# EAGLE board inktime (EAGLE 9.7.0)
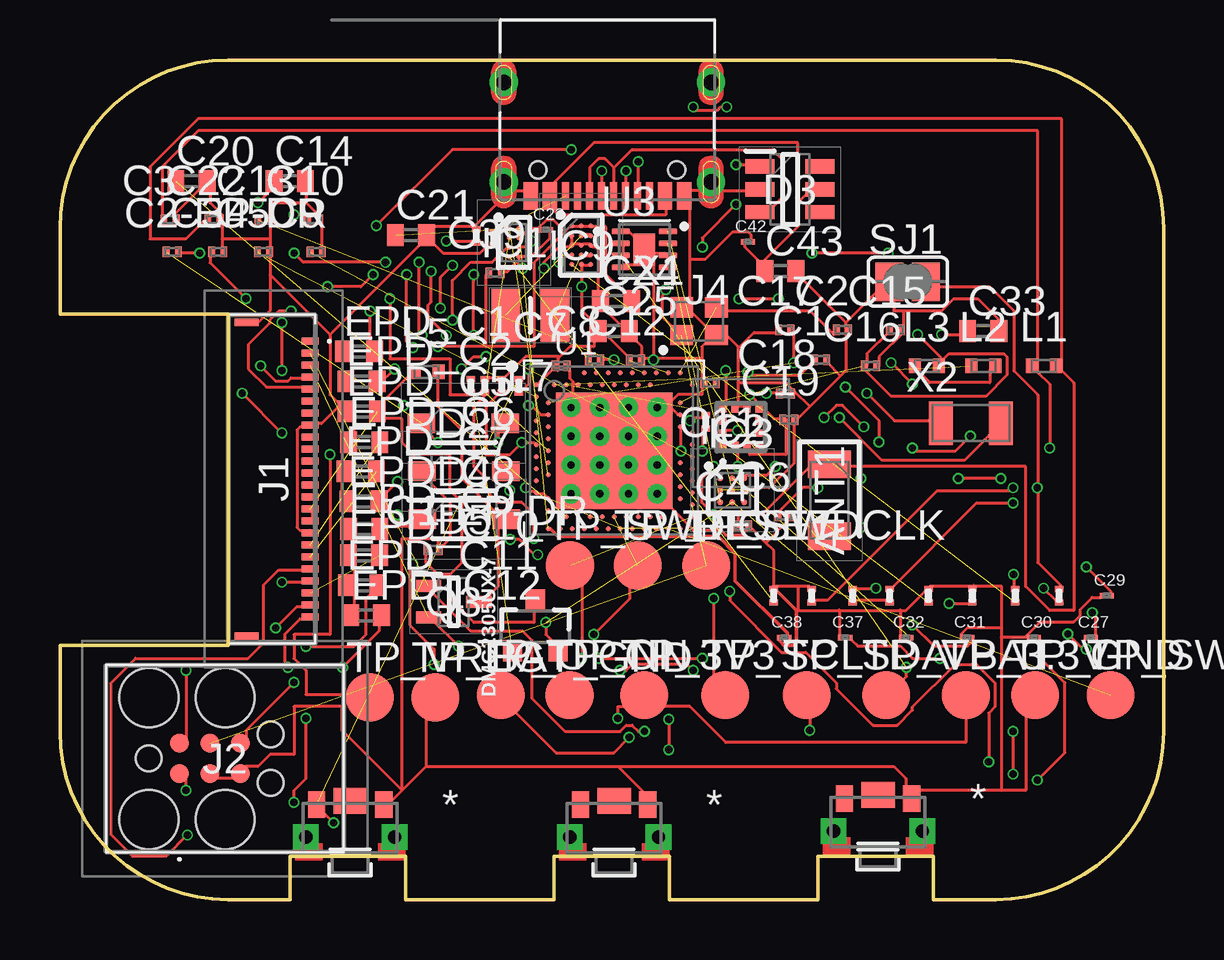
[diagram p0: board, top side]
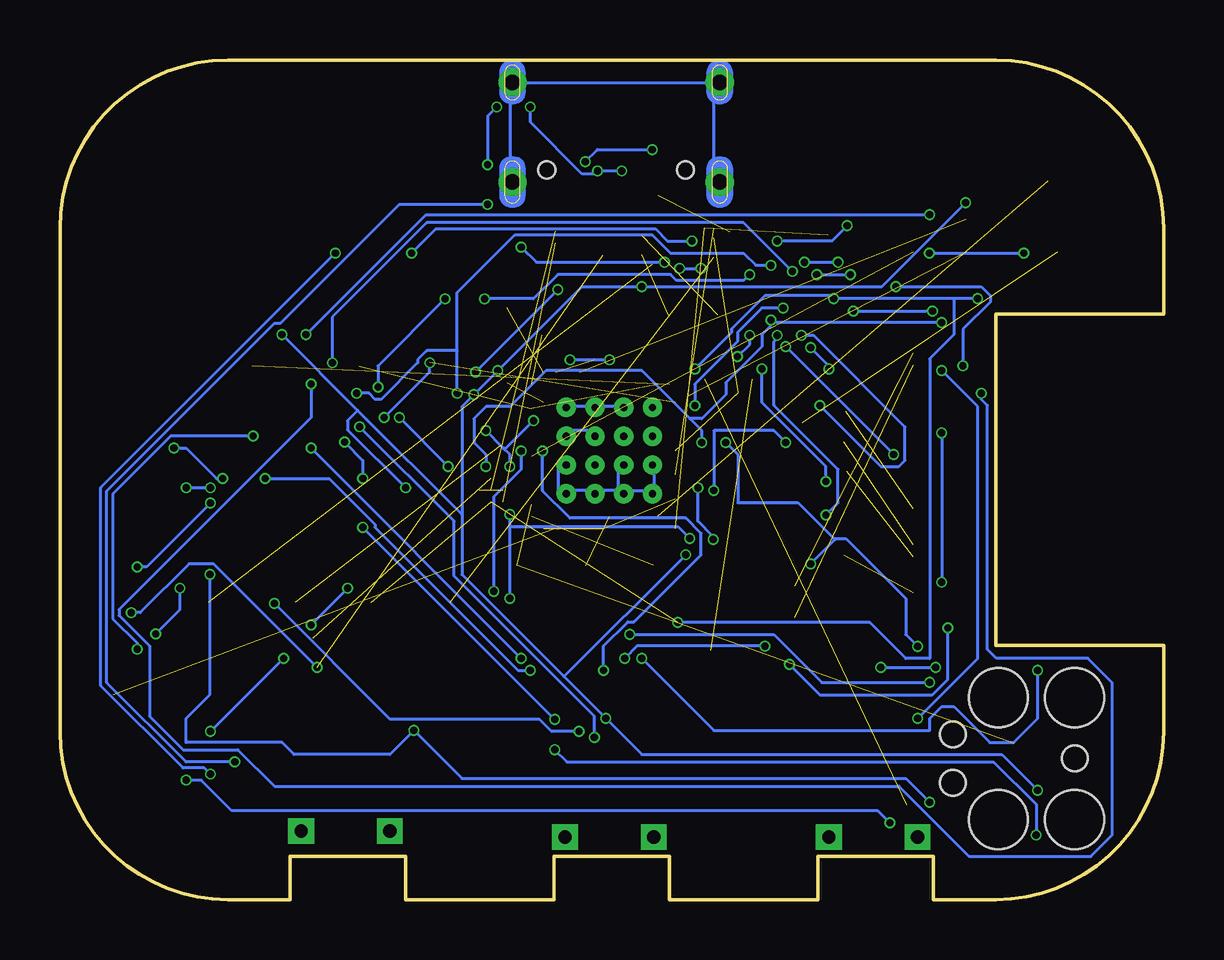
[diagram p1: board, bottom side, seen from below]

Size 46 x 35 mm. Coordinates in mm from the lower left corner, seen from the top.
Outline: 39,0 36.4,0 36.4,1.8 31.6,1.8 31.6,0 25.4,0 25.4,1.8 20.6,1.8 20.6,0 14.4,0 14.4,1.8 9.6,1.8 9.6,0 7,0 arc-90 0,7 0,10.6 7,10.6 7,24.4 0,24.4 0,28 arc-90 7,35 39,35 arc-90 46,28 46,7 arc-90 39,0
Copper layers (1*16): Top 0.035mm / dielectric 1.6mm / Bottom 0.035mm
Design rules "Fusion Electronics Design Rules *": minimum track width 5mil, minimum drill 0.3mm, track to track 5mil, track to pad 5mil, pad to pad 5mil, via to via 5mil, smd to smd 5mil, copper to edge 0.2mm, drill to drill 6mil, minimum pad ring 10mil, minimum via ring 3mil, stop-mask expansion 4mil, vias tented up to drill 0mil, thermal gap 10mil

## Footprints (pad centres in the part's own frame; a part is rotated, then mirrored left to right if it is on the bottom)
2450AT18B100E_ANTC3216X140N = smd 1.15 x 1.8: 1 -1.5,0; 2 1.5,0
NORDIC_NRF_3_RESC0201_L = smd 0.28 x 0.43: 1 -0.255,0; 2 0.255,0
ESP32_C6_LIBRARY_1_ESP32_WROVER_EAGLE-LTSPICE_C0402 = smd 0.7 x 0.9: 1 -0.65,0; 2 0.65,0
GRM011R60J152KE01L_2_CAPC0201X13N = smd 0.22 x 0.23: 1 -0.185,0; 2 0.185,0
ESP32_C6_LIBRARY_5_SOD3716X135N = smd 1.15 x 0.8: 1 -1.75,0; 2 1.75,0
ESP32_C6_LIBRARY_3_SOT95P280X145-6N = smd 1.2 x 0.6: 1 -1.25,0.95; 2 -1.25,0; 3 -1.25,-0.95; 4 1.25,-0.95; 5 1.25,0; 6 1.25,0.95
ESP32_C6_LIBRARY_4_ESP32_C6_LIBRARY_4_ESP32_C6_LIBRARY_4_ESP32_C6_LIBRARY_4_ESP32_WROVER_SPARKFUN-DISCRETESEMI_SOT23-3 = smd 0.8 x 0.9: 1 -0.95,-1; 2 0.95,-1; 3 0,1.1
BQ25180YBGR_BGA8C40P2X4_100X155X50 = smd 0.2 x 0.2: A1 -0.2,0.6; A2 0.2,0.6; B1 -0.2,0.2; B2 0.2,0.2; C1 -0.2,-0.2; C2 0.2,-0.2; D1 -0.2,-0.6; D2 0.2,-0.6
DRV2605YZFR_BGA9C50P3X3_144X144X62 = smd 0.25 x 0.25: A1 -0.5,0.5; A2 0,0.5; A3 0.5,0.5; B1 -0.5,0; B2 0,0; B3 0.5,0; C1 -0.5,-0.5; C2 0,-0.5; C3 0.5,-0.5
BMA423_BMA423 = smd 0.3 x 0.35: 1 -0.75,-0.775; 2 -0.25,-0.775; 3 0.25,-0.775; 4 0.75,-0.775; 7 0.75,0.775; 8 0.25,0.775; 9 -0.25,0.775; 10 -0.75,0.775 | smd 0.35 x 0.3: 5 0.775,-0.25; 6 0.775,0.25; 11 -0.775,0.25; 12 -0.775,-0.25
RT6160AWSC_BGA15C40P3X5_140X230X60 = smd 0.216 x 0.216: A1 -0.4,0.8; A2 0,0.8; A3 0.4,0.8; B1 -0.4,0.4; B2 0,0.4; B3 0.4,0.4; C1 -0.4,0; C2 0,0; C3 0.4,0; D1 -0.4,-0.4; D2 0,-0.4; D3 0.4,-0.4; E1 -0.4,-0.8; E2 0,-0.8; E3 0.4,-0.8
503480-2400_5034802400 = smd 0.3 x 0.7: 1 -5.75,1.525; 2 -5.25,1.525; 3 -4.75,1.525; 4 -4.25,1.525; 5 -3.75,1.525; 6 -3.25,1.525; 7 -2.75,1.525; 8 -2.25,1.525; 9 -1.75,1.525; 10 -1.25,1.525; 11 -0.75,1.525; 12 -0.25,1.525; 13 0.25,1.525; 14 0.75,1.525; 15 1.25,1.525; 16 1.75,1.525; 17 2.25,1.525; 18 2.75,1.525; 19 3.25,1.525; 20 3.75,1.525; 21 4.25,1.525; 22 4.75,1.525; 23 5.25,1.525; 24 5.75,1.525 | smd 0.3 x 1: MP1 -6.54,-1.125; MP2 6.54,-1.125
TC2030-IDC_TC2030IDC = smd 0.783 x 0.783: 1 -0.953,-0.635; 2 -0.953,0.635; 3 0.317,-0.635; 4 0.317,0.635; 5 1.588,-0.635; 6 1.588,0.635 | hole 2.451: -2.223,-2.54; -2.223,2.54; 0.952,-2.54; 0.952,2.54 | hole 1.067: -2.223,0; 2.857,-1.016; 2.857,1.016
KH-TYPE-C-16P_KINGHELM_KH-TYPE-C-16P = smd 0.6 x 1.15: A1_B12 -3.2,4.725; A4_B9 -2.4,4.725; A9_B4 2.4,4.725; A12_B1 3.2,4.725 | smd 0.3 x 1.15: A5 -1.25,4.725; A6 -0.25,4.725; A7 0.25,4.725; A8 1.25,4.725; B5 1.75,4.725; B6 0.75,4.725; B7 -0.75,4.725; B8 -1.75,4.725 | drill 0.65 pad 1.05: SH1 -4.32,0; SH2 4.32,0; SH3 -4.32,4.15; SH4 4.32,4.15 | hole 0.7: -2.89,3.65; 2.89,3.65
NORDIC_NRF_2_RESC0402_L = smd 0.5 x 0.6: 1 -0.5,0; 2 0.5,0
MLP2016SR47MT0S1_INDC2016X100N = smd 1.2 x 2.2: 1 -1.028,0; 2 1.028,0
ESP32_C6_LIBRARY_6_SOT65P210X110-3N = smd 1.05 x 0.5: 1 -1.05,0.65; 2 -1.05,-0.65; 3 1.05,0
ERA-1AEB3401C_0201 = smd 0.35 x 0.25: 1 0,0.275; 2 0,-0.275
CPF0201D7K68C1_0201 = smd 0.35 x 0.25: 1 0,0.275; 2 0,-0.275
ESP32_C6_LIBRARY_7_JUMPER_SJ = smd 1.168 x 1.6: 1 -0.762,0; 2 0.762,0
2025-10-22_07-23-44_LIBRARY_SW_EVP-AKE31A_PAN = smd 0.711 x 1.092: 1 -1.4,-0.972; 2 1.4,-0.972 | drill 0.559 pad 0.914 square: 3 -1.848,0.381; 4 1.848,0.381 | smd 1.397 x 1.092: 5 0,-1.124
HECTOR_WATCH_1_TP20R = smd 2 x 2: TP 0,0
NORDIC_NRF_4_AQFN50P700X700X85_HS-74N = smd 4.85 x 4.85: P$74 0,0 | drill 0.3 pad 0.6: P$75 -1.8,1.8; P$76 -0.6,1.8; P$77 0.6,1.8; P$78 1.8,1.8; P$79 -1.8,0.6; P$80 -0.6,0.6; P$81 0.6,0.6; P$82 1.8,0.6; P$83 -1.8,-0.6; P$84 -0.6,-0.6; P$85 0.6,-0.6; P$86 1.8,-0.6; P$87 -1.8,-1.8; P$88 -0.6,-1.8; P$89 0.6,-1.8; P$90 1.8,-1.8 | smd 0.2 x 0.2: P$A8 -1.25,3.25; P$A10 -0.75,3.25; P$A12 -0.25,3.25; P$A14 0.25,3.25; P$A16 0.75,3.25; P$A18 1.25,3.25; P$A20 1.75,3.25; P$A22 2.25,3.25; P$A23 2.75,3.25; P$AA24 3.25,-2.25; P$AB2 -2.75,-2.5; P$AC5 -2,-2.75; P$AC9 -1,-2.75; P$AC11 -0.5,-2.75; P$AC13 0,-2.75; P$AC15 0.5,-2.75; P$AC17 1,-2.75; P$AC19 1.5,-2.75; P$AC21 2,-2.75; P$AC24 3.25,-2.75; P$AD2 -2.75,-3.25; P$AD4 -2.25,-3.25; P$AD6 -1.75,-3.25; P$AD8 -1.25,-3.25; P$AD10 -0.75,-3.25; P$AD12 -0.25,-3.25; P$AD14 0.25,-3.25; P$AD16 0.75,-3.25; P$AD18 1.25,-3.25; P$AD20 1.75,-3.25; P$AD22 2.25,-3.25; P$AD23 2.75,-3.25; P$B1 -3.25,2.75; P$B3 -2.5,2.75; P$B5 -2,2.75; P$B7 -1.5,2.75; P$B9 -1,2.75; P$B11 -0.5,2.75; P$B13 0,2.75; P$B15 0.5,2.75; P$B17 1,2.75; P$B19 1.5,2.75; P$B24 3.25,2.75; P$C1 -3.25,2.25; P$D2 -2.75,2; P$D23 2.75,2; P$E24 3.25,1.75; P$F2 -2.75,1.5; P$F23 2.75,1.5; P$G1 -3.25,1.25; P$H2 -2.75,1; P$H23 2.75,1; P$J1 -3.25,0.75; P$J24 3.25,0.75; P$K2 -2.75,0.5; P$L1 -3.25,0.25; P$L24 3.25,0.25; P$M2 -2.75,0; P$N1 -3.25,-0.25; P$N24 3.25,-0.25; P$P2 -2.75,-0.5; P$P23 2.75,-0.5; P$R1 -3.25,-0.75; P$R24 3.25,-0.75; P$T2 -2.75,-1; P$T23 2.75,-1; P$U1 -3.25,-1.25; P$U24 3.25,-1.25; P$V23 2.75,-1.5; P$W1 -3.25,-1.75; P$W24 3.25,-1.75; P$Y2 -2.75,-2; P$Y23 2.75,-2
ESP32_C6_LIBRARY_SON50P200X200X80-9N = smd 0.76 x 0.27: 1 -0.985,0.75; 2 -0.985,0.25; 3 -0.985,-0.25; 4 -0.985,-0.75; 5 0.985,-0.75; 6 0.985,-0.25; 7 0.985,0.25; 8 0.985,0.75 | smd 0.9 x 1.3: 9 0,0
NORDIC_NRF_BT-XTAL_2016_N = smd 0.95 x 0.85: 1 -0.725,-0.575; 2 0.725,-0.575; 3 0.725,0.575; 4 -0.725,0.575
NORDIC_NRF_1_XTAL_3215_N = smd 1 x 1.8: 1 -1.25,0; 2 1.25,0

## Placement (x,y rotation side)
ANT1  2450AT18B100E  [2450AT18B100E_ANTC3216X140N]  32.07,16.65 270 top
C1  12pF  [NORDIC_NRF_3_RESC0201_L]  31.7,22.5 0 top
C1-EP-DR  10uF  [NORDIC_NRF_3_RESC0201_L]  15.56,14.59 0 top
C2  12pF  [NORDIC_NRF_3_RESC0201_L]  32.62,23.75 0 top
C2-EP-DR  4.7uF/25V  [NORDIC_NRF_3_RESC0201_L]  4.68,27 0 top
C3  1pF  [NORDIC_NRF_3_RESC0201_L]  4.59,28.35 0 top
C4  1pF  [NORDIC_NRF_3_RESC0201_L]  28.45,15.6 0 top
C5  100nF  [NORDIC_NRF_3_RESC0201_L]  8.48,27 0 top
C6  4.7µF  [NORDIC_NRF_3_RESC0201_L]  30.18,16 0 top
C7  100nF  [NORDIC_NRF_3_RESC0201_L]  20.88,22.25 0 top
C8  100nF  [NORDIC_NRF_3_RESC0201_L]  22.28,22.5 0 top
C9  820pF  [NORDIC_NRF_3_RESC0201_L]  10.68,27 0 top
C10  N.C.  [NORDIC_NRF_3_RESC0201_L]  10.58,28.35 0 top
C11  100pF  [NORDIC_NRF_3_RESC0201_L]  27.1,21.54 180 top
C12  100nF  [NORDIC_NRF_3_RESC0201_L]  23.98,22.5 0 top
C13  N.C.  [NORDIC_NRF_3_RESC0201_L]  8.5,28.35 0 top
C14  4.7µF  [ESP32_C6_LIBRARY_1_ESP32_WROVER_EAGLE-LTSPICE_C0402]  9.58,29.95 0 top
C15  1.0µF  [NORDIC_NRF_3_RESC0201_L]  34.83,23.75 0 top
C16  47nF  [NORDIC_NRF_3_RESC0201_L]  33.79,22.25 0 top
C17  12pF  [NORDIC_NRF_3_RESC0201_L]  30.21,23.75 0 top
C18  12pF  [NORDIC_NRF_3_RESC0201_L]  30.24,21.1 0 top
C19  100nF  [NORDIC_NRF_3_RESC0201_L]  30.38,20 0 top
C20  4.7µF  [ESP32_C6_LIBRARY_1_ESP32_WROVER_EAGLE-LTSPICE_C0402]  5.48,29.95 0 top
C21  4.7µF  [ESP32_C6_LIBRARY_1_ESP32_WROVER_EAGLE-LTSPICE_C0402]  14.63,27.7 0 top
C22  N.C.  [NORDIC_NRF_3_RESC0201_L]  6.42,28.35 0 top
C23  0.1uF  [GRM011R60J152KE01L_2_CAPC0201X13N]  20.26,27.92 0 top
C24  10uF  [ESP32_C6_LIBRARY_1_ESP32_WROVER_EAGLE-LTSPICE_C0402]  23.18,24.95 0 top
C25  22uF  [ESP32_C6_LIBRARY_1_ESP32_WROVER_EAGLE-LTSPICE_C0402]  23.08,23.7 0 top
C27  0.1uF  [GRM011R60J152KE01L_2_CAPC0201X13N]  42.97,10.92 0 top
C29  1uF  [GRM011R60J152KE01L_2_CAPC0201X13N]  43.64,12.67 0 top
C30  1uF  [GRM011R60J152KE01L_2_CAPC0201X13N]  40.6,10.92 0 top
C31  1uF  [GRM011R60J152KE01L_2_CAPC0201X13N]  37.81,10.92 0 top
C32  1uF  [GRM011R60J152KE01L_2_CAPC0201X13N]  35.27,10.92 0 top
C33  22uF  [ESP32_C6_LIBRARY_1_ESP32_WROVER_EAGLE-LTSPICE_C0402]  38.48,23.7 0 top
C34  0.1uF  [NORDIC_NRF_3_RESC0201_L]  6.58,27 0 top
C37  1uF  [GRM011R60J152KE01L_2_CAPC0201X13N]  32.73,10.92 0 top
C38  1uF  [GRM011R60J152KE01L_2_CAPC0201X13N]  30.19,10.92 0 top
C39  10uF  [NORDIC_NRF_3_RESC0201_L]  18.14,26.12 0 top
C42  0.1uF  [GRM011R60J152KE01L_2_CAPC0201X13N]  28.68,27.42 0 top
C43  4.7uF  [ESP32_C6_LIBRARY_1_ESP32_WROVER_EAGLE-LTSPICE_C0402]  30.03,26.2 0 top
D2  ESP32_C6_LIBRARY_5_MBR0530  [ESP32_C6_LIBRARY_5_SOD3716X135N]  16.82,19.86 0 top
D3  USBLC6-2SC6Y  [ESP32_C6_LIBRARY_3_SOT95P280X145-6N]  30.43,29.61 0 top
D4  ESP32_C6_LIBRARY_5_MBR0530  [ESP32_C6_LIBRARY_5_SOD3716X135N]  16.84,17.86 0 top
D5  ESP32_C6_LIBRARY_5_MBR0530  [ESP32_C6_LIBRARY_5_SOD3716X135N]  16.86,15.86 0 top
DMG2305UX-7  20V/4.2A/52mΩ/1.4W  [ESP32_C6_LIBRARY_4_ESP32_C6_LIBRARY_4_ESP32_C6_LIBRARY_4_ESP32_C6_LIBRARY_4_ESP32_WROVER_SPARKFUN-DISCRETESEMI_SOT23-3]  19.81,11.38 0 top
EPD_C1  1uF/50V  [ESP32_C6_LIBRARY_1_ESP32_WROVER_EAGLE-LTSPICE_C0402]  12.46,22.85 0 top
EPD_C2  1uF/50V  [ESP32_C6_LIBRARY_1_ESP32_WROVER_EAGLE-LTSPICE_C0402]  12.57,21.6 0 top
EPD_C5  0.1uF/50V  [ESP32_C6_LIBRARY_1_ESP32_WROVER_EAGLE-LTSPICE_C0402]  12.58,20.35 0 top
EPD_C6  1uF/50V  [ESP32_C6_LIBRARY_1_ESP32_WROVER_EAGLE-LTSPICE_C0402]  12.68,19.07 0 top
EPD_C7  1uF/50V  [ESP32_C6_LIBRARY_1_ESP32_WROVER_EAGLE-LTSPICE_C0402]  12.54,17.85 0 top
EPD_C8  1uF/50V  [ESP32_C6_LIBRARY_1_ESP32_WROVER_EAGLE-LTSPICE_C0402]  12.65,16.6 0 top
EPD_C9  1uF/50V  [ESP32_C6_LIBRARY_1_ESP32_WROVER_EAGLE-LTSPICE_C0402]  12.68,15.45 0 top
EPD_C10  1uF/50V  [ESP32_C6_LIBRARY_1_ESP32_WROVER_EAGLE-LTSPICE_C0402]  12.67,14.35 0 top
EPD_C11  1uF/50V  [ESP32_C6_LIBRARY_1_ESP32_WROVER_EAGLE-LTSPICE_C0402]  12.6,13.1 0 top
EPD_C12  1uF/50V  [ESP32_C6_LIBRARY_1_ESP32_WROVER_EAGLE-LTSPICE_C0402]  12.76,11.85 0 top
IC1  BQ25180YBGR  [BQ25180YBGR_BGA8C40P2X4_100X155X50]  18.93,27.39 0 top
IC2  DRV2605YZFR  [DRV2605YZFR_BGA9C50P3X3_144X144X62]  28.03,17.07 0 top
IC3  BMA421  [BMA423_BMA423]  28.38,19.7 0 top
IC9  RT6160AWSC  [RT6160AWSC_BGA15C40P3X5_140X230X60]  21.73,27.28 0 top
J1  503480-2400  [503480-2400_5034802400]  8.9,17.53 270 top
J2  TC2030-IDC  [TC2030-IDC_TC2030IDC]  5.93,5.88 0 top
J4  KH-TYPE-C-16P  [KH-TYPE-C-16P_KINGHELM_KH-TYPE-C-16P]  22.82,34.07 180 top
L1  3.9nH  [NORDIC_NRF_2_RESC0402_L]  41.01,22.25 0 top
L2  10µH  [NORDIC_NRF_2_RESC0402_L]  38.48,22.25 0 top
L3  15nH  [NORDIC_NRF_2_RESC0402_L]  36.13,22.25 0 top
L5  68uH  [NORDIC_NRF_2_RESC0402_L]  15.28,22 0 top
L7  FTC252012SR47MBCA  [MLP2016SR47MT0S1_INDC2016X100N]  19.61,24.36 0 top
Q3  SI1308EDL-T1-GE3  [ESP32_C6_LIBRARY_6_SOT65P210X110-3N]  16.41,12.42 0 top
R1_EP_DR  0.47  [ERA-1AEB3401C_0201]  41.65,12.67 0 top
R1_USB  5K1  [CPF0201D7K68C1_0201]  17.36,27.67 0 top
R2  0  [CPF0201D7K68C1_0201]  39.82,12.67 0 top
R2_EP_DR  10K  [ERA-1AEB3401C_0201]  38.03,12.67 0 top
R2_USB  5K1  [ERA-1AEB3401C_0201]  18.08,27.56 0 top
R3  0  [ERA-1AEB3401C_0201]  36.2,12.67 0 top
R4  0  [CPF0201D7K68C1_0201]  26.91,19.92 0 top
R5  10k  [CPF0201D7K68C1_0201]  19.12,21.42 0 top
R7  10k  [CPF0201D7K68C1_0201]  34.58,12.67 0 top
R8  10k  [CPF0201D7K68C1_0201]  33.04,12.67 0 top
R9  10K  [ERA-1AEB3401C_0201]  29.75,12.67 0 top
R17  3K3  [CPF0201D7K68C1_0201]  17.71,21.42 0 top
R18  3K3  [CPF0201D7K68C1_0201]  18.42,21.42 0 top
R_PWR_EPD  10K  [CPF0201D7K68C1_0201]  17.13,21.42 0 top
R_TYPE_SEL  2.2  [ERA-1AEB3401C_0201]  31.34,12.67 0 top
SJ1  [ESP32_C6_LIBRARY_7_JUMPER_SJ]  35.34,25.76 0 top
SW_DN  2025-10-22_07-23-44_LIBRARY_EVP-AKE31ASW_EVP-AKE31A_PAN  [2025-10-22_07-23-44_LIBRARY_SW_EVP-AKE31A_PAN]  34.1,3.24 180 top
SW_ENT  2025-10-22_07-23-44_LIBRARY_EVP-AKE31ASW_EVP-AKE31A_PAN  [2025-10-22_07-23-44_LIBRARY_SW_EVP-AKE31A_PAN]  23.1,2.99 180 top
SW_UP  2025-10-22_07-23-44_LIBRARY_EVP-AKE31ASW_EVP-AKE31A_PAN  [2025-10-22_07-23-44_LIBRARY_SW_EVP-AKE31A_PAN]  12.1,2.99 180 top
TP_3.3V  HECTOR_WATCH_1_TPTP20R  [HECTOR_WATCH_1_TP20R]  37.76,8.53 0 top
TP_3V3  HECTOR_WATCH_1_TPTP20R  [HECTOR_WATCH_1_TP20R]  24.36,8.53 0 top
TP_BAT_GND  HECTOR_WATCH_1_TPTP20R  [HECTOR_WATCH_1_TP20R]  15.64,8.43 0 top
TP_GND  HECTOR_WATCH_1_TPTP20R  [HECTOR_WATCH_1_TP20R]  40.65,8.53 0 top
TP_ON  HECTOR_WATCH_1_TPTP20R  [HECTOR_WATCH_1_TP20R]  21.24,8.53 0 top
TP_OP  HECTOR_WATCH_1_TPTP20R  [HECTOR_WATCH_1_TP20R]  18.37,8.53 0 top
TP_RESET  HECTOR_WATCH_1_TPTP20R  [HECTOR_WATCH_1_TP20R]  24.08,13.93 0 top
TP_SCL  HECTOR_WATCH_1_TPTP20R  [HECTOR_WATCH_1_TP20R]  27.73,8.53 0 top
TP_SDA  HECTOR_WATCH_1_TPTP20R  [HECTOR_WATCH_1_TP20R]  31.12,8.53 0 top
TP_SWDCLK  HECTOR_WATCH_1_TPTP20R  [HECTOR_WATCH_1_TP20R]  26.94,13.93 0 top
TP_SWDIO  HECTOR_WATCH_1_TPTP20R  [HECTOR_WATCH_1_TP20R]  21.26,13.93 0 top
TP_SWO  HECTOR_WATCH_1_TPTP20R  [HECTOR_WATCH_1_TP20R]  43.79,8.53 0 top
TP_VBAT  HECTOR_WATCH_1_TPTP20R  [HECTOR_WATCH_1_TP20R]  34.43,8.53 0 top
TP_VREG  HECTOR_WATCH_1_TPTP20R  [HECTOR_WATCH_1_TP20R]  12.92,8.43 0 top
U1  NRF52840_QF  [NORDIC_NRF_4_AQFN50P700X700X85_HS-74N]  23.1,18.72 0 top
U3  MAX17048G+T10  [ESP32_C6_LIBRARY_SON50P200X200X80-9N]  24.36,27.11 0 top
X1  32MHz  [NORDIC_NRF_BT-XTAL_2016_N]  26.64,24.11 0 top
X2  32.768kHz  [NORDIC_NRF_1_XTAL_3215_N]  37.97,19.86 0 top

## Library data of the parts
ANT1 = InkTime_v5 (1); ARROW_PART_NUMBER: 2450AT18B100E; ARROW_PRICE-STOCK: https://www.arrow.com/en/products/2450at18b100e/johanson-dielectrics?utm_currency=USD&region=nac; DESCRIPTION: Antennas 2.45GHz ANTENNA; HEIGHT: 1.4mm; MANUFACTURER_NAME: JOHANSON TECHNOLOGY; MANUFACTURER_PART_NUMBER: 2450AT18B100E; MOUSER_PART_NUMBER: 609-2450AT18B100E; MOUSER_PRICE-STOCK: https://www.mouser.co.uk/ProductDetail/Johanson-Technology/2450AT18B100E?qs=yCnrNFeXz%252Bh5MFsFIXGZGA%3D%3D
C1 C1-EP-DR C2 C2-EP-DR C3-C13 C15-C19 C22 C34 C39 L1-L3 L5 R1_EP_DR R1_USB R2 R2_EP_DR R2_USB R3-R5 R7-R9 R17 R18 R_PWR_EPD R_TYPE_SEL SJ1 TP_3.3V TP_3V3 TP_BAT_GND TP_GND TP_ON TP_OP TP_RESET TP_SCL TP_SDA TP_SWDCLK TP_SWDIO TP_SWO TP_VBAT TP_VREG U1 X1 X2 = InkTime_v5 (1)
C14 C20 C21 C24 C25 C33 C43 EPD_C1 EPD_C2 EPD_C5-EPD_C12 = InkTime_v5 (1); SPICEMODEL: NONE; SPICEPREFIX: C
C23 C27 C29-C32 C37 C38 C42 = InkTime_v5 (1); AVAILABILITY: In Stock; CHECK_PRICES: https://www.snapeda.com/parts/GRM011R60J152KE01L/Murata/view-part/?ref=eda; DESCRIPTION: SMD Capacitor X5R(EIA) with Capacitance: 1500pF Tol. 10%. Rated Voltage: 6.3Vdc; MF: Murata; MP: GRM011R60J152KE01L; PACKAGE: 0201 Murata; PRICE: None; SNAPEDA_LINK: https://www.snapeda.com/parts/GRM011R60J152KE01L/Murata/view-part/?ref=snap
D2 D4 D5 = InkTime_v5 (1); AVAILABILITY: In Stock; CHECK_PRICES: https://www.snapeda.com/parts/MBR0530/Onsemi/view-part/?ref=eda; DESCRIPTION: Diode Schottky 30 V 500mA Surface Mount SOD-123; MF: ON Semiconductor; MP: MBR0530; PACKAGE: SOD-123-2 ON Semiconductor; PRICE: None; PURCHASE-URL: https://www.snapeda.com/api/url_track_click_mouser/?unipart_id=179458&manufacturer=ON Semiconductor&part_name=MBR0530&search_term=None; SNAPEDA_LINK: https://www.snapeda.com/parts/MBR0530/Onsemi/view-part/?ref=snap
D3 = InkTime_v5 (1); AVAILABILITY: In Stock; CHECK_PRICES: https://www.snapeda.com/parts/USBLC6-2SC6Y/STMicroelectronics/view-part/?ref=eda; DESCRIPTION: 17V Clamp 5A (8/20µs) Ipp Tvs Diode Surface Mount SOT-23-6; MF: STMicroelectronics; MP: USBLC6-2SC6Y; PACKAGE: SOT-23-6 STMicroelectronics; PRICE: None; SNAPEDA_LINK: https://www.snapeda.com/parts/USBLC6-2SC6Y/STMicroelectronics/view-part/?ref=snap
DMG2305UX-7 = InkTime_v5 (1); PROD_ID: TRAN-14388
IC1 = InkTime_v5 (1); ARROW_PART_NUMBER: BQ25180YBGR; ARROW_PRICE-STOCK: https://www.arrow.com/en/products/bq25180ybgr/texas-instruments?utm_currency=USD&region=nac; DESCRIPTION: Charger IC Lithium Ion/Polymer, Lithium Iron Phosphate 8-DSBGA (1.6x1.1); HEIGHT: 0.5mm; MANUFACTURER_NAME: Texas Instruments; MANUFACTURER_PART_NUMBER: BQ25180YBGR; MOUSER_PART_NUMBER: 595-BQ25180YBGR; MOUSER_PRICE-STOCK: https://www.mouser.co.uk/ProductDetail/Texas-Instruments/BQ25180YBGR?qs=doiCPypUmgEWjAK%252BJAX6Tw%3D%3D
IC2 = InkTime_v5 (1); ARROW_PART_NUMBER: DRV2605YZFR; ARROW_PRICE-STOCK: https://www.arrow.com/en/products/drv2605yzfr/texas-instruments?region=nac; DESCRIPTION: Haptic Driver for ERM/LRA with Built-In Library and Smart Loop Architecture; HEIGHT: 0.625mm; MANUFACTURER_NAME: Texas Instruments; MANUFACTURER_PART_NUMBER: DRV2605YZFR
IC3 = InkTime_v5 (1); ARROW_PART_NUMBER: BMA423; ARROW_PRICE-STOCK: https://www.arrow.com/en/products/bma423/bosch; DESCRIPTION: Accelerometers Triaxial low-g 12bit Acceleration Sensor; HEIGHT: 1mm; MANUFACTURER_NAME: BOSCH; MANUFACTURER_PART_NUMBER: BMA423; MOUSER_PART_NUMBER: 262-BMA423; MOUSER_PRICE-STOCK: https://www.mouser.co.uk/ProductDetail/Bosch-Sensortec/BMA423?qs=HXFqYaX1Q2xC%252BSgeGoX3mg%3D%3D
IC9 = InkTime_v5 (1); DESCRIPTION: Buck-Boost Regulator Positive Output Step-Up/Step-Down I2C DC-DC Controller IC 15-WL-CSP (BSC) (1.4x2.3); HEIGHT: 0.6mm; MANUFACTURER_NAME: RICHTEK; MANUFACTURER_PART_NUMBER: RT6160AWSC; MOUSER_PART_NUMBER: 835-RT6160AWSC; MOUSER_PRICE-STOCK: https://www.mouser.co.uk/ProductDetail/Richtek/RT6160AWSC?qs=amGC7iS6iy%2FLd9PSoixZXQ%3D%3D
J1 = InkTime_v5 (1); DESCRIPTION: FFC & FPC Connectors 0.5mm FPC RA SMT Dual Contact 24Ckt; HEIGHT: 1.87mm; MANUFACTURER_NAME: Molex; MANUFACTURER_PART_NUMBER: 503480-2400; MOUSER_PART_NUMBER: 538-503480-2400; MOUSER_PRICE-STOCK: https://www.mouser.co.uk/ProductDetail/Molex/503480-2400?qs=OAhjpuo3Vu7efIoxFh9AOw%3D%3D
J2 = InkTime_v5 (1); DESCRIPTION: CABLE ADAPTER 6 POS; HEIGHT: 19mm; MANUFACTURER_NAME: Tag Connect; MANUFACTURER_PART_NUMBER: TC2030-IDC
J4 = InkTime_v5 (1); AVAILABILITY: Not in stock; CHECK_PRICES: https://www.snapeda.com/parts/KH-TYPE-C-16P/Kinghelm/view-part/?ref=eda; MF: kinghelm; MP: KH-TYPE-C-16P; PACKAGE: None; PRICE: None; SNAPEDA_LINK: https://www.snapeda.com/parts/KH-TYPE-C-16P/Kinghelm/view-part/?ref=snap
L7 = InkTime_v5 (1); DESCRIPTION: SMD / SMT Inductors (Coils), L=0.47?H, L x W x T :; HEIGHT: 1mm; JLCPCB: https://jlcpcb.com/partdetail/6763488-FTC252012SR47MBCA/C5832368; MANUFACTURER_NAME: TDK; MANUFACTURER_PART_NUMBER: FTC252012SR47MBCA
Q3 = InkTime_v5 (1); AVAILABILITY: In Stock; CHECK_PRICES: https://www.snapeda.com/parts/SI1308EDL-T1-GE3/Vishay+Siliconix/view-part/?ref=eda; DESCRIPTION: Si1308EDL-T1-GE3 N-channel MOSFET Transistor, 1.5 A, 30 V, 3-Pin SC-70 | Siliconix / Vishay SI1308EDL-T1-GE3; MF: Vishay Siliconix; MP: SI1308EDL-T1-GE3; PACKAGE: SOT-323 Vishay Semiconductor; PRICE: None; PURCHASE-URL: https://www.snapeda.com/api/url_track_click_mouser/?unipart_id=274603&manufacturer=Vishay Siliconix&part_name=SI1308EDL-T1-GE3&search_term=None; SNAPEDA_LINK: https://www.snapeda.com/parts/SI1308EDL-T1-GE3/Vishay+Siliconix/view-part/?ref=snap
SW_DN SW_ENT SW_UP = InkTime_v5 (1); COPYRIGHT: Copyright (C) 2025 Ultra Librarian. All rights reserved.; DIGI-KEY_PART_NUMBER_1: P123437TR-ND; DIGI-KEY_PART_NUMBER_2: P123437CT-ND; DIGI-KEY_PART_NUMBER_3: P123437DKR-ND; MANUFACTURER_NAME: Panasonic; MANUFACTURER_PART_NUMBER: EVP-AKE31A
U3 = InkTime_v5 (1); AVAILABILITY: In Stock; CHECK_PRICES: https://www.snapeda.com/parts/MAX17048G+T10/Analog+Devices/view-part/?ref=eda; DESCRIPTION: 3µA 1-Cell/2-Cell Fuel Gauge with ModelGauge; MF: Analog Devices; MP: MAX17048G+T10; PACKAGE: TDFN-8 Maxim; PRICE: None; PURCHASE-URL: https://www.snapeda.com/api/url_track_click_mouser/?unipart_id=329239&manufacturer=Analog Devices&part_name=MAX17048G+T10&search_term=None; SNAPEDA_LINK: https://www.snapeda.com/parts/MAX17048G+T10/Analog+Devices/view-part/?ref=snap

## Nets
3V3/1.7D: C34.1 DMG2305UX-7.2 IC2.C2 R5.2 R7.2 R8.2 R_PWR_EPD.2
3V3/2.4A: C6.1 C7.1 C8.1 C12.1 C14.1 C19.1 C25.1 C33.1 IC3.3 IC3.7 IC3.10 IC9.E2 IC9.E3 J2.1 R17.1 R18.1 TP_3.3V.TP TP_3V3.TP U1.P$A22 U1.P$AD14 U1.P$AD23 U1.P$B1 U1.P$W1 U1.P$Y2
ALERT/1.6C: U3.5
ALERT/2.5C: U1.P$J24
D+/1.5D: D3.4
D+/2.7D: U1.P$AD6
D-/1.5D: D3.6
D-/2.7D: U1.P$AD4
DN: D3.1 J4.A7 J4.B7
DP: D3.3 J4.A6 J4.B6
EPD_3V3: C1-EP-DR.1 DMG2305UX-7.3 EPD_C5.2 J1.15 J1.16 L5.1
EPD_BUSY/1.5D: J1.9
EPD_BUSY/2.2D: U1.P$AD12
EPD_CS/1.4C: J1.12
EPD_CS/2.2D: U1.P$K2
EPD_DC/1.5D: J1.11
EPD_DC/2.2D: U1.P$AD10
EPD_RST/1.5D: J1.10
EPD_RST/2.2D: U1.P$AC11
GDR: J1.2 Q3.1 R2_EP_DR.2
GND: C1-EP-DR.2 C1.2 C2.2 C3.2 C4.2 C5.2 C6.2 C7.2 C8.2 C9.2 C10.2 C11.2 C12.2 C13.2 C14.2 C15.2 C16.2 C17.1 C18.2 C19.2 C20.2 C21.2 C22.2 C23.2 C24.1 C25.2 C29.1 C30.1 C31.1 C32.1 C33.2 C34.2 C37.1 C38.1 C39.2 C42.2 C43.2 D3.2 D4.1 EPD_C5.1 EPD_C6.1 EPD_C7.1 EPD_C8.1 EPD_C9.1 EPD_C10.1 EPD_C11.1 EPD_C12.1 IC1.D2 IC2.B1 IC2.B3 IC3.8 IC3.9 IC9.B1 IC9.C1 IC9.C2 IC9.C3 J1.8 J1.17 J1.MP1 J2.3 J2.5 J4.A1_B12 J4.A12_B1 J4.SH1 J4.SH2 J4.SH3 J4.SH4 R1_USB.1 R2_EP_DR.1 R2_USB.2 R3.1 R9.1 R_TYPE_SEL.1 SJ1.1 SW_DN.1 SW_ENT.1 SW_UP.1 TP_BAT_GND.TP TP_GND.TP U1.P$74 U1.P$75 U1.P$76 U1.P$77 U1.P$78 U1.P$79 U1.P$80 U1.P$81 U1.P$82 U1.P$83 U1.P$84 U1.P$85 U1.P$86 U1.P$87 U1.P$88 U1.P$89 U1.P$90 U1.P$B7 U1.P$F23 U3.1 U3.4 U3.6 U3.9 X1.2 X1.4
HAPTIC_EN/1.4C: IC2.A1
HAPTIC_EN/2.6A: U1.P$U1
IMU_INT1: U1.P$N1
IMU_INT2: U1.P$P2
JJ: C10.1 C15.1 C16.1 L3.2 U1.P$B5 U1.P$E24
LX1: IC9.B2 IC9.B3 L7.1
LX2: IC9.D2 IC9.D3 L7.2
MOSI/1.5B: J1.14
MOSI/2.2D: U1.P$B13
MU_INT1: IC3.5
MU_INT2: IC3.6
N$1: IC1.D1 R9.2
N$2: IC9.D1 R4.2
N$3: IC9.E1 R2.2
N$4: IC3.1 R3.2
N$5: C20.1 U1.P$AC5
N$6: C18.1 U1.P$F2 X2.1
N$7: C17.2 U1.P$D2 X2.2
N$8: C5.1 U1.P$C1
N$9: C9.1 U1.P$N24
N$10: L2.1 U1.P$B3
N$11: L2.2 L3.1
N$12: C3.1 L1.1 U1.P$H23
N$13: ANT1.1 C4.1 C22.1 L1.2
N$14: C11.1 U1.P$D23
N$15: C2.1 U1.P$A23 X1.3
N$16: C1.1 U1.P$B24 X1.1
N$17: C2-EP-DR.2 D5.2 L5.2 Q3.3
N$18: C2-EP-DR.1 D2.1 D4.2
N$20: R1_EP_DR.1 R_TYPE_SEL.2 SJ1.2
N$21: J1.MP2
N$22: C13.1 U1.P$A18
N$23: C32.2 IC2.A2
N$24: EPD_C2.2 J1.4
N$25: EPD_C1.2 J1.5
N$26: EPD_C2.1
N$27: EPD_C1.1
N$28: EPD_C6.2 J1.18
N$29: EPD_C7.2 J1.19
N$30: EPD_C8.2 J1.20
N$31: J4.A5 R1_USB.2
N$32: EPD_C10.2 J1.22
N$33: C31.2 R8.1
N$34: EPD_C12.2 J1.24
N$35: J4.B5 R2_USB.1
N$36: C29.2 R7.1
OUT: IC2.C3
OUT+: IC2.A3 TP_OP.TP
OUT-: TP_ON.TP
P0.04: U1.P$J1
P0.09: U1.P$L24
P0.13/1.5D: C30.2 R5.1 SW_UP.2
P0.13/2.6C: U1.P$AD8
P0.14/1.5D: SW_ENT.2
P0.14/2.7C: U1.P$AC9
P0.19: U1.P$AC15
P0.20: U1.P$AD16
P0.21: U1.P$AC17
P0.22: U1.P$AD18
P0.23: U1.P$AC19
P0.24: U1.P$AD20
P0.25: U1.P$AC21
P0.26: U1.P$G1
P0.27: U1.P$H2
P0.28: U1.P$B11
P0.29: U1.P$A10
P0.30: U1.P$B9
P0.31: U1.P$A8
P1.01/1.6C: DMG2305UX-7.1 R_PWR_EPD.1
P1.01/2.4B: U1.P$Y23
P1.02/1.6C: SW_DN.2
P1.02/2.8C: U1.P$W24
P1.03: U1.P$V23
P1.04: U1.P$U24
P1.05: U1.P$T23
P1.06: U1.P$R24
P1.07: U1.P$P23
P1.09: U1.P$R1
P1.10: U1.P$A20
P1.11: U1.P$B19
P1.12: U1.P$B17
P1.13: U1.P$A16
P1.14: U1.P$B15
P1.15: U1.P$A14
PMIC_INT: IC1.A1 U1.P$T2
PREVGH: D5.1 EPD_C9.2 J1.21
PREVGL: D2.2 EPD_C11.2 J1.23
RESE: J1.3 Q3.2 R1_EP_DR.2
RESET: J2.6 TP_RESET.TP U1.P$AC13
SCK/1.5B: J1.13
SCK/2.2D: U1.P$A12
SCL/1.4C: IC2.C1 U3.7
SCL/2.4C: IC1.B1 IC3.12 R4.1 R17.2 TP_SCL.TP U1.P$M2
SDA/1.4C: IC2.B2 U3.8
SDA/2.4C: IC1.C1 IC3.2 R2.1 R18.2 TP_SDA.TP U1.P$L1
SWDCLK: J2.4 TP_SWDCLK.TP U1.P$AA24
SWDIO: J2.2 TP_SWDIO.TP U1.P$AC24
SWO: TP_SWO.TP U1.P$AD22
VBAT/1.2A: C27.2 TP_VBAT.TP U3.2 U3.3
VBAT/2.5C: C37.2 IC1.C2
VBUS/1.5D: C42.1 C43.1 D3.5 J4.A4_B9 J4.A9_B4
VBUS/2.6D: C21.1 C38.2 IC1.A2 U1.P$AD2
VREG: C23.1 C24.2 C39.1 IC1.B2 IC9.A1 IC9.A2 IC9.A3 TP_VREG.TP

## Tracks (layer width: path | path; a pad name or v marks a point on that pad's centre or on a via)
3V3/1.7D  (via drill 0.3)  (2 unrouted)
  Top 0.127: v13.75,25.05 13.75,22.55 16.25,22.55 16.25,21.05 17.25,21.05 R_PWR_EPD.2 | v7.75,25.05 6.25,26.55 6.25,27.05 C34.1 | v20.25,11.55 20.25,11.05 20.75,10.55 DMG2305UX-7.2 | 33.12,12.47 34.52,12.47 R7.2 | 33.12,12.47 R8.2 33.12,12.47 | v19.53,22.12 19.53,21.49 19.28,21.24 19.15,21.24 R5.2
  Bottom 0.127: v7.75,25.05 8.75,25.05 | 8.75,25.05 v13.75,25.05 13.82,25.17 16.61,25.17 18.01,23.78 18.01,23.65 v19.53,22.12 | v20.25,11.55 12.25,11.55 10.75,10.05 9.75,10.05 9.75,22.55 8.75,23.55 8.75,25.05
3V3/2.4A  (via drill 0.3)  (3 unrouted)
  Top 0.127: TP_3.3V.TP 37.75,8.05 37.75,6.55 27.75,6.55 26.25,8.05 24.75,8.05 TP_3V3.TP 24.25,8.05 23.25,8.05 v23.25,7.55 | C25.1 22.25,24.05 21.75,24.55 v21.75,25.55 21.75,26.55 IC9.E2 21.82,26.44 22.08,26.44 IC9.E3 | 20.82,22.62 21.25,23.05 22.08,23.05 | 20.82,22.62 20.75,22.55 20.75,22.05 C7.1 20.55,22.12 19.92,21.49 U1.P$B1 | 22.08,23.05 22.25,23.05 22.25,23.55 C25.1 | C12.1 23.75,22.55 22.75,23.55 C25.1 | 30.25,20.05 30.25,18.55 28.75,18.55 28.75,19.05 IC3.3 | v27.75,22.05 27.75,20.55 IC3.10 | 29.25,20.55 v28.75,21.05 | v5.25,4.55 5.25,5.05 J2.1 | v8.25,29.05 8.75,29.55 C14.1 | v36.75,23.55 37.75,23.55 C33.1 | 30.25,20.05 29.75,20.05 29.25,20.55 | 30.25,20.05 C19.1 | 29.25,20.55 IC3.7 | R17.1 17.76,21.74 18.39,21.74 R18.1 18.52,21.74 19.41,22.63 20.8,22.63 20.82,22.62 | U1.P$Y2 20.3,16.79 20.17,16.92 19.92,16.92 U1.P$W1 19.79,17.05 19.53,17.05 v19.41,17.17 | 22.08,23.05 22.08,22.51 C8.1 | v31.6,17.17 30.97,17.17 29.95,16.16 29.95,16.03 C6.1 | v18.77,15.01 19.15,15.01 19.79,14.38 v19.92,14.38
  Bottom 0.127: v5.25,4.55 6.75,6.05 21.75,6.05 v23.25,7.55 25,9.3 | 25,9.3 29.25,13.55 29.25,16.05 | 29.25,16.05 29.25,20.55 v28.75,21.05 v27.75,22.05 24.25,25.55 v21.75,25.55 11.75,25.55 v8.25,29.05 | 29.25,16.05 33.59,20.39 | 33.59,20.39 v36.75,23.55 | v31.6,17.17 34.01,19.58 34.01,19.97 33.59,20.39 | v19.41,17.17 19.41,15.77 18.77,15.14 v18.77,15.01 | 25,9.3 v19.92,14.38
DN  (via drill 0.3)
  Top 0.127: v22.58,30.38 22.58,29.36 J4.A7 | v23.6,30.38 23.6,29.36 J4.B7 | v28.17,30.63 29.06,30.63 D3.1 | v27.79,33.05 27.54,33.05 27.41,32.92 26.52,32.92 v26.39,33.05
  Bottom 0.127: v22.58,30.38 v23.6,30.38 23.73,30.25 24.23,30.25 26.39,32.41 v26.39,33.05 | v28.17,30.63 28.17,32.67 v27.79,33.05
DP
  Top 0.127: 23.09,30.51 22.71,30.89 22.46,30.89 22.08,30.51 22.08,29.36 J4.B6 | 23.09,30.51 23.09,29.36 J4.A6 | 23.09,30.51 23.85,31.27 29.69,31.27 30.08,30.89 30.08,29.24 29.57,28.73 29.19,28.73 D3.3
EPD_3V3  (1 unrouted)
  Top 0.127: L5.1 14.75,22.05 13.25,20.55 EPD_C5.2 13.25,20.05 14.25,20.05 14.25,19.05 14.75,18.55 16.25,18.55 16.25,17.05 16.75,16.55 16.75,14.05 16.25,13.55 | 16.25,13.55 15.75,13.55 15.25,14.05 15.25,14.55 C1-EP-DR.1 | 16.25,13.55 16.25,12.55 17.25,11.55 19.75,11.55 19.75,12.05 DMG2305UX-7.3 | J1.16 10.52,15.9 10.52,16.16 J1.15
GDR  (via drill 0.3)  (1 unrouted)
  Top 0.127: v37.06,12.35 37.95,12.35 R2_EP_DR.2 | v24.36,7.01 24.11,7.01 23.85,7.27 23.6,7.27 23.34,7.01 21.06,7.01 19.66,8.41 19.66,10.82 19.28,11.2 17.12,11.2 15.34,12.98 Q3.1
  Bottom 0.127: v37.06,12.35 32.23,7.52 26.01,7.52 25.5,7.01 v24.36,7.01
GND  (via drill 0.3)  (1 unrouted)
  Top 0.127: 30.75,13.05 31.25,13.05 R_TYPE_SEL.1 | 30.75,13.05 29.75,13.05 | 36.25,13.05 35.25,12.05 35.03,12.05 | 32.49,12.05 30.75,12.05 30.75,13.05 | 32.49,12.05 35.03,12.05 | 29.43,14.87 29.75,14.55 29.75,13.05 | 29.43,14.87 28.75,15.55 | 39.25,4.55 40.25,4.55 40.25,8.05 TP_GND.TP | 39.25,4.55 35.75,4.55 SW_DN.1 35.25,4.55 35.25,5.05 34.75,5.55 23.25,5.55 | 38.08,13.05 39.25,13.05 39.25,11.33 | 38.08,13.05 36.25,13.05 | 39.25,4.55 39.25,10.95 | 39.25,10.95 39.25,11.33 | 36.25,13.05 R3.1 | 15.75,14.55 16.25,15.05 16.25,16.55 15.25,17.55 D4.1 | J2.3 6.25,5.05 7.25,5.05 J2.5 7.75,5.55 8.25,5.55 8.75,6.05 9.75,6.05 9.75,8.05 11.75,8.05 11.75,7.05 14.25,4.55 | 15.25,5.55 14.25,4.55 | 14.25,4.55 13.75,4.05 SW_UP.1 | 15.25,5.55 15.25,8.05 TP_BAT_GND.TP | 23.25,5.55 24.25,4.55 24.25,4.05 SW_ENT.1 | 15.25,5.55 23.25,5.55 | 15.75,14.55 15.75,15.05 14.25,15.05 14.25,4.55 | 15.75,14.55 C1-EP-DR.2 | 17.25,28.05 18.25,29.05 18.25,29.55 J4.SH4 18.75,29.55 19.75,29.55 J4.A12_B1 | 17.25,28.05 15.25,28.05 C21.2 | 17.25,28.05 R1_USB.1 | EPD_C5.1 12.25,20.05 12.25,19.05 EPD_C6.1 11.75,19.05 11.75,18.05 EPD_C7.1 11.75,17.55 11.75,16.55 EPD_C8.1 12.25,16.55 12.25,15.55 EPD_C9.1 12.25,15.05 12.25,14.55 EPD_C10.1 12.25,14.05 12.25,13.05 | 12.25,13.05 12.25,12.05 EPD_C12.1 | 12.25,13.05 EPD_C11.1 | 10.25,29.05 10.75,28.55 C10.2 10.9,28.35 10.9,27.08 C9.2 | 10.25,29.05 10.25,29.55 C14.2 | 8.75,28.55 8.75,27.55 | 8.75,27.55 8.75,27.05 | C3.2 4.75,28.55 6.25,30.05 C20.2 6.25,29.55 6.25,29.05 6.75,28.55 | 6.75,28.55 6.75,27.55 | 6.75,27.55 6.75,27.05 C34.2 | 6.75,28.55 C22.2 | 6.75,27.55 8.75,27.55 | 8.75,27.05 8.75,26.05 | 8.75,26.05 8.75,24.55 8.25,24.05 J1.MP1
  Top 0.127: 8.75,27.05 C5.2 | 10.25,29.05 8.75,29.05 8.75,28.55 | 8.75,28.55 C13.2 | 11.25,23.55 11.25,21.05 11.75,20.55 EPD_C5.1 | 8.75,26.05 11.25,23.55 | 11.25,23.55 15.25,27.55 C21.2 | 35.16,24.55 34.75,24.55 34.75,25.55 SJ1.1 34.25,25.55 32.75,24.05 | 35.16,24.55 36.75,24.55 37.25,25.05 38.25,25.05 39.25,24.05 C33.2 | 32.53,21.83 32.75,22.05 32.75,23.55 | 32.53,21.83 31.25,20.55 | 31.25,20.55 30.75,20.05 C19.2 30.58,19.97 30.58,18.19 29.57,17.17 28.55,17.17 IC2.B3 | 32.75,24.05 30.75,26.05 C43.2 | 32.75,23.55 32.75,24.05 | 32.75,23.55 C2.2 | 21.25,20.55 21.75,21.05 | C7.2 21.25,22.05 21.25,21.73 21.39,21.59 21.39,21.49 | U1.P$79 21.25,19.55 21.75,20.05 U1.P$74 | U1.P$80 22.25,19.55 U1.P$74 | 21.25,20.55 U1.P$75 | 21.25,20.55 U1.P$74 | 21.75,21.05 22.25,20.55 U1.P$76 | 21.75,21.05 U1.P$74 | U1.P$85 23.75,18.05 23.25,18.55 U1.P$74 | U1.P$81 23.75,19.05 23.25,19.05 U1.P$74 | U1.P$84 22.75,18.05 22.75,18.55 U1.P$74 | D3.2 28.75,29.55 27.25,29.55 J4.SH3 26.75,29.55 26.25,29.55 J4.A1_B12 26.25,29.05 26.25,26.7 | 28.25,20.55 28.75,20.55 IC3.8 | 26.75,22.55 26.75,23.05 27.25,23.55 | 26.75,22.55 26.75,21.55 | 26.75,22.55 24.75,22.55 | 24.75,22.55 24.25,22.55 | 28.25,23.05 28.25,21.55 | 28.25,21.55 28.25,20.55 | 28.25,23.05 27.75,23.55 X1.2 27.25,23.55 | 28.25,20.55 IC3.9 | 23.75,23.55 24.25,23.05 24.25,22.55 | 24.25,22.55 C12.2 | 23.75,23.55 22.75,24.55 C24.1 22.46,25.05 22.46,27.08 22.33,27.2 22.2,27.2 IC9.C3 22.08,27.33 21.82,27.33 IC9.C2 21.69,27.33 21.31,27.33 | 23.75,23.55 C25.2 | 27.25,23.55 26.25,24.55 X1.4 26.25,25.05 26.25,26.7 | 24.75,22.55 24.75,26.44 | 24.75,26.44 24.75,27.05 U3.9 | 26.75,21.55 26.75,21.05 25.75,21.05 25.25,20.55 U1.P$78
  Top 0.127: 26.75,21.55 C11.2 | 30.57,21.23 30.25,21.55 28.25,21.55 | 30.57,21.23 31.25,20.55 | 28.75,15.55 C4.2 | U1.P$90 25.25,17.05 25.25,16.55 26.4,15.4 27.55,15.4 27.75,15.19 28.41,15.19 28.75,15.53 28.75,15.55 | U1.P$74 21.39,20.43 21.39,21.49 | R9.1 29.75,13.05 | J1.17 10.39,15.39 10.01,15.39 9.88,15.52 9.88,19.58 10.01,19.71 10.39,19.71 J1.8 10.52,19.84 10.9,19.84 11.66,20.6 EPD_C5.1 | 19.03,26.57 18.65,26.19 18.39,26.19 C39.2 | 19.03,26.57 19.15,26.7 IC1.D2 19.15,26.82 19.66,26.82 20.42,27.59 20.42,27.84 C23.2 | C16.2 34.14,22.25 34.14,22.63 35.16,23.65 C15.2 35.16,23.78 35.16,24.55 | 21.31,27.33 21.31,27.59 IC9.B1 | 21.31,27.33 IC9.C1 21.31,27.2 20.8,27.2 20.17,26.57 v20.17,26.32 | 21.39,21.49 21.57,21.49 U1.P$B7 | U1.P$F23 25.76,20.22 25.38,20.6 U1.P$74 | 32.49,12.05 32.49,10.95 C37.1 | 32.49,12.09 32.49,12.05 | 35.03,12.05 35.03,10.95 C32.1 | 35.03,12.09 35.03,12.05 | 39.25,11.33 37.82,11.33 37.57,11.08 37.57,10.95 C31.1 | 39.25,10.95 40.24,10.95 | 40.24,10.95 40.36,10.95 C30.1 | 39.22,10.95 39.25,10.95 | 26.25,26.7 26.9,26.7 28.04,27.84 28.68,27.84 28.81,27.71 28.81,27.46 C42.2 | 40.24,10.95 40.87,11.58 42.27,11.58 42.52,11.84 42.52,12.09 43.03,12.6 43.41,12.6 C29.1 | 38.08,13.05 38.08,12.98 R2_EP_DR.1 | 38.08,13.11 38.08,13.05 | R2_USB.2 18.01,27.2 17.76,27.2 17.5,26.95 15.98,26.95 15.34,27.59 C21.2 | v23.09,22.51 22.58,22.51 C8.2 | v24.74,22.51 24.75,22.55 | 29.43,14.87 30.33,15.77 30.33,15.9 C6.2 | C17.1 29.95,23.65 28.93,23.65 28.3,23.01 28.25,23.05 | C18.2 30.58,21.11 30.58,21.24 30.57,21.23 | 32.53,21.83 31.98,22.38 C1.2 | 24.75,26.44 23.47,26.44 U3.4 | U3.1 23.47,27.84 23.73,27.84 24.36,27.2 U3.9
  Top 0.127: U3.6 25.25,26.95 24.74,26.95 U3.9 | v19.28,26.32 19.03,26.57
  Top 0.152: R9.1 29.8,12.94 30.69,12.06 30.69,10.72 30.57,10.6 30.18,10.6 30,10.78 C38.1
  Bottom 0.127: 18.75,34.05 18.75,30.05 J4.SH4 | U1.P$86 25.25,18.05 25.25,17.05 U1.P$90 24.75,17.05 23.75,17.05 | 21.25,17.05 21.25,18.05 U1.P$83 | 22.75,17.05 22.75,18.05 U1.P$84 | 22.75,17.05 23.75,17.05 | 22.75,17.05 U1.P$88 22.25,17.05 21.25,17.05 | 21.25,17.05 U1.P$87 | 23.75,17.05 U1.P$89 | 23.75,20.55 22.75,20.55 U1.P$76 | U1.P$82 24.75,19.55 23.75,19.55 U1.P$81 | 23.75,20.55 24.75,20.55 U1.P$78 | 23.75,20.55 U1.P$77 | J4.SH3 27.25,30.05 27.25,34.05 J4.SH1 26.75,34.05 18.75,34.05 | 18.75,34.05 J4.SH2 | v24.74,22.51 v23.09,22.51 | v20.17,26.32 v19.28,26.32
JJ  (via drill 0.3)  (2 unrouted)
  Top 0.127: v9.75,28.55 10.25,28.55 C10.1 | v35.75,23.55 36.75,22.55 36.75,22.05 L3.2 36.81,22.51 37.06,22.76 39.35,22.76 39.47,22.63 39.47,21.87 38.58,20.98 34.65,20.98 33.63,22 33.63,22.12 | 33.63,22.25 33.63,22.76 34.52,23.65 C15.1 | 33.63,22.25 C16.1 | 33.63,22.12 C16.1 | 33.63,22.25 C16.1 | 33.63,22.12 C16.1
  Bottom 0.127: v9.75,28.55 30.75,28.55 v35.75,23.55
LX1  (1 unrouted)
  Top 0.127: IC9.B2 21.82,27.71 22.08,27.71 IC9.B3
LX2  (1 unrouted)
  Top 0.127: IC9.D2 21.82,26.82 22.08,26.82 IC9.D3
N$1  (1 unrouted)
N$2  (via drill 0.3)
  Top 0.127: v20.8,26.57 21.06,26.82 21.31,26.82 IC9.D1 | v26.77,27.2 26.77,27.59 v28.17,28.98 | v38.71,5.74 38.71,7.77 38.97,8.03 38.97,9.04 38.2,9.81 37.31,9.81 35.54,8.03 35.54,7.9 34.9,7.27 33.89,7.27 32.36,8.79 32.36,9.04 31.09,10.31 30.08,10.31 27.92,12.47 v27.92,12.85 | v26.77,18.7 26.77,19.46 26.9,19.58 R4.2
  Bottom 0.127: v20.8,26.57 26.14,26.57 v26.77,27.2 | v28.17,28.98 31.85,28.98 36.81,24.03 37.06,24.03 44.05,17.05 44.05,9.04 40.74,5.74 v38.71,5.74 | v27.92,12.85 27.92,16.79 26.77,17.93 v26.77,18.7
N$3  (1 unrouted)
N$4  (1 unrouted)
N$5  (1 unrouted)
N$6  (via drill 0.3)
  Top 0.127: U1.P$F2 20.04,20.22 19.66,20.6 v19.53,20.6 | v15.85,24.66 15.85,25.94 v16.36,26.44 | v29.44,21.11 29.95,21.11 C18.1 | v33.63,21.11 34.78,19.97 36.68,19.97 X2.1
  Bottom 0.127: v19.53,20.6 19.53,21.49 17.76,23.27 17.76,23.65 16.74,24.66 v15.85,24.66 | v16.36,26.44 16.99,26.44 17.5,26.95 20.55,26.95 21.31,27.71 27.03,27.71 29.44,25.3 29.44,22.89 | v29.44,21.11 29.44,22.89 | v33.63,21.11 33.12,21.11 32.87,20.86 32.62,20.86 31.09,22.38 31.09,22.51 30.71,22.89 29.44,22.89
N$7  (via drill 0.3)  (1 unrouted)
  Top 0.127: v30.58,22.38 30.58,23.65 C17.2 | v32.49,20.09 34.27,18.31 37.7,18.31 39.22,19.84 X2.2
  Bottom 0.127: v30.58,22.38 30.58,22 v32.49,20.09
N$8  (1 unrouted)
N$9  (1 unrouted)
N$10  (1 unrouted)
N$11
  Top 0.127: L3.1 35.75,22.05 36.25,21.55 38.75,21.55 38.75,22.05 L2.2
N$12  (via drill 0.3)
  Top 0.127: C3.1 4.25,28.55 4.25,30.55 5.75,32.05 40.75,32.05 40.75,22.05 L1.1 40.74,22 41.25,21.49 v41.25,18.82 | v25.89,18.7 25.89,19.71 U1.P$H23 | v23.34,9.55 23.6,9.55 23.85,9.81 26.14,9.81 v26.39,9.55 | v39.22,17.55 v37.44,17.55
  Bottom 0.127: v25.89,18.7 25.89,17.05 24.74,15.9 19.92,15.9 19.28,15.27 19.28,14.38 22.08,11.58 22.33,11.58 23.34,10.57 v23.34,9.55 | v26.39,9.55 26.9,9.55 32.87,15.52 32.87,15.65 34.78,17.55 v37.44,17.55 | v39.22,17.55 39.47,17.55 40.74,18.82 v41.25,18.82
N$13
  Top 0.127: C4.1 28.25,15.55 28.25,16.05 29.25,16.05 31.75,18.55 ANT1.1 32.25,18.05 40.25,18.05 40.25,13.05 41.25,12.05 42.25,12.05 42.25,21.55 41.75,22.05 | 41.75,22.05 41.75,32.55 5.75,32.55 3.75,30.55 3.75,27.55 5.25,27.55 6.25,28.55 C22.1 | 41.75,22.05 L1.2
N$14  (1 unrouted)
N$15  (1 unrouted)
  Top 0.127: C2.1 32.25,23.55 31.25,24.55 27.75,24.55 X1.3
N$16  (via drill 0.3)  (1 unrouted)
  Top 0.127: v28.68,22 28.81,21.87 30.84,21.87 31.35,22.38 C1.1 | v25.25,25.43 25.25,25.3 25.12,25.17 25.12,24.28 25.89,23.52 | 25.89,23.52 X1.1 | X1.1 25.89,23.52 | X1.1 25.89,23.52
  Bottom 0.127: v25.25,25.43 v28.68,22
N$17  (via drill 0.3)
  Top 0.127: 15.75,20.55 15.75,22.05 L5.2 | 15.75,20.55 16.75,19.55 16.75,17.55 18.25,16.05 D5.2 18.25,15.55 18.25,13.05 17.75,12.55 Q3.3 | v5.82,26.95 5.06,26.95 C2-EP-DR.2 | v9.76,26.95 10.14,26.57 v13.57,26.57 | v14.96,26.57 14.96,23.65 v15.09,23.52 | v14.33,20.6 15.73,20.6 15.75,20.55
  Bottom 0.127: v9.76,26.95 v5.82,26.95 | v14.96,26.57 v13.57,26.57 | v15.09,23.52 14.58,23.52 10.77,19.71 10.77,18.31 11.03,18.06 11.79,18.06 v14.33,20.6
N$18  (via drill 0.3)  (1 unrouted)
  Top 0.127: v18.75,17.05 18.75,17.55 D4.2 | v15.75,19.05 15.25,19.55 D2.1
  Bottom 0.127: v18.75,17.05 18.75,19.55 16.25,19.55 v15.75,19.05
N$20  (via drill 0.3)
  Top 0.127: v40.75,17.17 40.75,21.05 39.75,22.05 39.75,24.55 38.75,25.55 36.25,25.55 SJ1.2 | v40.75,17.17 40.75,14.05 41.75,13.05 R1_EP_DR.1 | v39.73,17.17 39.6,17.05 36.55,17.05 31.98,12.47 31.35,12.47 R_TYPE_SEL.2 | v40.74,17.17 v40.75,17.17
  Bottom 0.127: v40.74,17.17 v39.73,17.17
N$22  (1 unrouted)
N$23  (1 unrouted)
N$24  (via drill 0.3)
  Top 0.127: v8.36,22.25 8.99,21.62 9.5,21.62 9.63,21.74 10.39,21.74 J1.4 | v11.15,25.55 12.55,25.55 v13.06,26.06 | v14.45,26.06 14.45,23.27 v14.71,23.01 | v13.95,22.12 13.31,21.49 EPD_C2.2
  Bottom 0.127: v8.36,22.25 8.36,23.78 7.22,24.92 7.22,25.17 7.6,25.55 v11.15,25.55 | v14.45,26.06 v13.06,26.06 | v14.71,23.01 13.95,22.25 v13.95,22.12
N$25  (via drill 0.3)
  Top 0.127: v9.63,24.54 9.12,24.54 8.74,24.16 8.74,24.03 7.85,23.14 7.85,22.12 8.61,21.36 10.39,21.36 J1.5 | v12.93,24.54 12.93,23.01 13.06,22.89 EPD_C1.2
  Bottom 0.127: v12.93,24.54 v9.63,24.54
N$28  (1 unrouted)
N$29  (1 unrouted)
N$30  (via drill 0.3)
  Top 0.127: v5.31,2.69 4.42,1.8 3.02,1.8 2.14,2.69 2.14,9.04 3.15,10.06 7.85,10.06 8.49,10.69 8.49,13.11 9.12,13.74 10.39,13.74 J1.20 | v25.38,7.52 v25.38,6.25 | v33.38,17.55 v33.38,15.52 | v34.14,19.08 34.14,19.97 v32.74,21.36 | v28.3,25.05 v29.95,25.05 | v17.25,23.52 v17.25,26.06 | v17.76,22.63 17.25,22.63 v16.74,22.12 | v14.07,17.43 13.31,16.66 EPD_C8.2
  Bottom 0.127: v5.31,2.69 5.31,3.96 7.09,5.74 24.87,5.74 v25.38,6.25 | v33.38,15.52 v25.38,7.52 | v33.38,17.55 33.38,18.31 v34.14,19.08 | v32.74,21.36 32.74,22.25 v29.95,25.05 | v28.3,25.05 26.27,25.05 25.25,26.06 20.55,26.06 20.3,25.81 17.5,25.81 v17.25,26.06 | v17.25,23.52 17.25,23.14 v17.76,22.63 | v16.74,22.12 16.74,20.73 14.07,18.06 v14.07,17.43
N$31  (via drill 0.3)
  Top 0.127: v16.11,27.46 17.25,27.46 R1_USB.2 | v13.19,28.09 16.36,31.27 v21.31,31.27 | v24.11,30.76 24.11,29.36 J4.A5
  Bottom 0.127: v16.11,27.46 13.82,27.46 v13.19,28.09 | v21.31,31.27 23.6,31.27 v24.11,30.76
N$32  (1 unrouted)
N$33  (via drill 0.3)
  Top 0.127: v35.54,11.46 36.43,10.57 37.82,10.57 37.95,10.69 37.95,10.82 C31.2 | v34.01,12.98 33.12,12.98 R8.1
  Bottom 0.127: v34.01,12.98 v35.54,11.46
N$34  (via drill 0.3)
  Top 0.127: v9.5,9.68 9.38,9.81 9.38,11.08 10.01,11.71 10.39,11.71 J1.24 | v11.79,9.68 13.31,11.2 13.31,11.84 EPD_C12.2
  Bottom 0.127: v11.79,9.68 v9.5,9.68
N$35  (1 unrouted)
N$36  (via drill 0.3)
  Top 0.127: v42.78,13.87 43.79,12.85 43.79,12.73 C29.2 | v39.73,16.54 38.2,16.54 34.65,12.98 R7.1
  Bottom 0.127: v42.78,13.87 42.39,13.87 v39.73,16.54
OUT+  (via drill 0.3)
  Top 0.127: v29.82,18.06 29.44,17.68 28.55,17.68 IC2.A3 | v31.85,20.09 32.36,20.6 32.62,20.6 v33.5,19.71 | v23.73,6.76 23.09,6.12 20.68,6.12 18.39,8.41 TP_OP.TP
  Bottom 0.127: v31.85,20.09 v29.82,18.06 | v33.5,19.71 29.57,15.77 29.57,13.49 23.73,7.65 v23.73,6.76
P0.13/1.5D  (via drill 0.3)  (1 unrouted)
  Top 0.127: v40.74,4.98 41.89,6.12 41.89,9.04 40.87,10.06 40.87,10.82 C30.2 | 10.77,3.84 v11.41,3.2 | 10.77,3.84 SW_UP.2 | SW_UP.2 10.77,3.84 | SW_UP.2 10.77,3.84
  Bottom 0.127: v40.74,4.98 40.11,4.98 38.84,3.71 11.91,3.71 v11.41,3.2
P1.01/1.6C  (1 unrouted)
PMIC_INT  (1 unrouted)
PREVGH  (via drill 0.3)
  Top 0.127: 14.07,15.55 14.75,15.55 D5.1 | 14.07,15.55 13.25,15.55 EPD_C9.2 | v9.25,13.23 10.39,13.23 J1.21 | v7.6,21.11 v9.25,19.46 | v34.65,22.38 v35.54,21.49 | v15.47,26.19 15.47,24.92 15.34,24.79 15.34,24.28 v16.11,23.52 | 14.07,15.55 v14.07,16.03 | 14.07,15.52 14.07,15.55
  Bottom 0.127: v9.25,19.46 v9.25,13.23 | v7.6,21.11 7.6,20.86 7.34,20.6 7.34,10.44 6.96,10.06 3.15,10.06 2.14,9.04 2.14,2.69 3.02,1.8 8.1,1.8 11.03,4.73 37.06,4.73 38.58,6.25 40.87,6.25 42.27,7.65 42.27,10.57 43.54,11.84 43.54,12.09 35.54,20.09 v35.54,21.49 | v34.65,22.38 34.65,24.28 30.71,28.22 17.5,28.22 v15.47,26.19 | v16.11,23.52 16.11,23.39 16.23,23.27 16.23,20.6 13.57,17.93 13.57,16.54 v14.07,16.03
PREVGL  (via drill 0.3)
  Top 0.127: v10.25,10.55 12.25,10.55 12.75,11.05 12.75,12.55 13.25,13.05 EPD_C11.2 | v18.25,19.05 18.25,19.55 D2.2 | v8.99,11.33 9.88,12.22 10.39,12.22 J1.23 | v15.6,9.81 15.6,10.44 14.58,11.46 14.58,13.87 v14.71,14
  Bottom 0.127: v10.25,10.55 10.75,11.05 10.75,12.55 13.25,15.05 13.69,15.05 | 13.69,15.05 13.75,15.05 15.25,16.55 17.75,16.55 17.75,18.55 v18.25,19.05 | v8.99,11.33 8.99,9.17 9.63,8.54 14.33,8.54 v15.6,9.81 | v14.71,14 13.69,15.01 13.69,15.05
RESE  (via drill 0.3)  (1 unrouted)
  Top 0.127: v41,12.98 41.51,12.47 41.63,12.47 R1_EP_DR.2 | v42.01,11.08 42.65,10.44 v42.78,10.44 | v37.95,19.33 37.31,18.7 35.66,18.7 v35.54,18.82 | v22.46,10.06 v26.77,10.06 | v16.61,10.57 15.47,11.71 Q3.2
  Bottom 0.127: v41,12.98 41,12.09 v42.01,11.08 | v42.78,10.44 42.78,10.69 43.79,11.71 43.79,16.92 41.38,19.33 v37.95,19.33 | v26.77,10.06 v35.54,18.82 | v22.46,10.06 21.95,10.57 v16.61,10.57
RESET  (via drill 0.3)  (1 unrouted)
  Top 0.127: v9.75,9.05 7.75,7.05 7.75,6.55 J2.6 | v22.25,11.05 23.75,12.55 23.75,13.55 TP_RESET.TP
  Bottom 0.127: v9.75,9.05 14.25,9.05 16.25,11.05 v22.25,11.05
SCL/1.4C  (1 unrouted)
SCL/2.4C  (via drill 0.3)  (2 unrouted)
  Top 0.127: v28.25,19.55 27.75,19.55 IC3.12 | v27.25,18.05 26.75,17.55 26.75,16.55 v27.25,16.05 | v27.25,12.55 27.25,8.55 TP_SCL.TP | v19.75,15.05 19.75,16.05 19.25,16.55 18.25,16.55 17.75,17.05 17.75,17.55 17.25,18.05 17.25,20.55 17.75,21.05 R17.2 | v26.27,19.97 26.39,20.09 26.9,20.09 R4.1
  Bottom 0.127: 27.53,18.83 27.25,18.55 v27.25,18.05 | 27.53,18.83 v28.25,19.55 | v27.25,12.55 27.25,15.55 | 27.25,15.55 v27.25,16.05 | v19.75,15.05 20.25,15.55 27.25,15.55 | v26.27,19.97 27.41,18.82 27.54,18.82 27.53,18.83
SDA/1.4C  (1 unrouted)
SDA/2.4C  (via drill 0.3)
  Top 0.127: v28.25,18.05 28.25,19.05 IC3.2 | R18.2 18.25,21.05 17.75,20.55 17.75,18.55 18.75,18.55 v19.25,19.05 19.77,19.05 U1.P$L1 | v39.75,13.55 39.75,13.05 R2.1 | v31.25,7.05 31.25,8.05 TP_SDA.TP | v9.25,22.05 v9.25,24.05 | v10.25,7.55 10.25,5.05 9.75,4.55 v9.75,4.05 | v16.36,24.16 16.36,25.81 17.12,26.57 18.01,26.57 18.65,27.2 IC1.C1
  Bottom 0.127: v28.25,18.05 28.25,18.55 28.75,19.05 28.75,20.05 28.25,20.55 27.25,20.55 25.75,22.05 21.75,22.05 19.75,20.05 | 19.75,20.05 19.25,19.55 v19.25,19.05 | v39.75,13.55 39.75,8.55 40.75,7.55 40.75,6.55 36.75,6.55 36.25,6.05 32.25,6.05 v31.25,7.05 29.25,5.05 10.75,5.05 v9.75,4.05 | 19.75,20.05 19.25,20.05 18.25,21.05 18.25,21.55 16.75,23.05 16.75,23.55 16.25,24.05 16.23,24.05 | v9.25,24.05 16.23,24.05 | v9.25,22.05 7.75,20.55 7.75,10.05 v10.25,7.55 | v16.36,24.16 16.23,24.03 16.23,24.05
SWDCLK  (2 unrouted)
SWDIO  (via drill 0.3)  (1 unrouted)
  Top 0.127: v5.25,9.55 5.25,6.55 J2.2 | v21.75,10.05 21.75,13.55 TP_SWDIO.TP
  Bottom 0.127: v5.25,9.55 5.25,7.55 6.25,6.55 7.25,6.55 8.75,8.05 9.25,8.05 9.75,7.55 9.75,7.05 18.75,7.05 v21.75,10.05
SWO  (1 unrouted)
VBAT/1.2A  (via drill 0.3)  (1 unrouted)
  Top 0.127: U3.3 23.47,26.95 23.47,27.33 U3.2 | v43.03,11.97 43.16,11.84 43.16,10.95 C27.2 | v35.28,9.68 35.28,9.3 34.52,8.54 TP_VBAT.TP
  Bottom 0.127: v43.03,11.97 42.65,11.97 40.62,14 39.6,14 v35.28,9.68
VBAT/2.5C  (via drill 0.3)
  Top 0.127: v19.66,27.46 19.41,27.2 19.15,27.2 IC1.C2 | v34.52,26.95 v31.35,26.95 | v39.73,7.01 v39.73,5.23 | v36.68,10.06 35.54,10.06 35.03,10.57 33.25,10.57 33,10.82 C37.2
  Bottom 0.127: v19.66,27.46 20.68,27.46 21.19,27.97 30.33,27.97 v31.35,26.95 | v34.52,26.95 44.3,17.17 44.3,8.92 40.87,5.49 39.98,5.49 v39.73,5.23 | v36.68,10.06 v39.73,7.01
VBUS/1.5D
  Top 0.127: J4.A4_B9 25.25,29.05 25.25,28.55 20.75,28.55 20.25,29.05 J4.A9_B4 20.25,29.55 22.25,31.55 30.75,31.55 30.75,29.05 | 30.75,29.05 30.75,28.05 29.25,26.55 C43.1 29.19,26.57 28.55,27.2 28.55,27.33 C42.1 | 30.75,29.05 31.25,29.55 D3.5
VBUS/2.6D  (2 unrouted)
  Top 0.152: C38.2 30.32,10.98 30.32,11.12 28.14,13.29 28.14,14.43 27.44,15.13 20.76,15.13 20.42,15.47 | 20.42,15.47 U1.P$AD2 20.42,15.47
VREG  (via drill 0.3)
  Top 0.127: 21.75,28.05 21.25,28.05 | 22.2,28.05 22.75,28.05 22.75,26.05 23.75,25.05 C24.2 | 22.2,28.05 21.75,28.05 | 21.75,28.05 IC9.A2 | 17.75,23.05 17.75,26.05 C39.1 | 17.75,23.05 19.75,23.05 19.75,26.55 21.05,27.85 | 21.25,28.05 21.05,27.85 | 21.25,28.05 IC9.A1 | v11.25,18.55 11.25,11.05 9.75,11.05 9.75,10.05 10.25,9.55 10.25,8.55 12.75,8.55 TP_VREG.TP | 17.75,23.05 v15.75,23.05 | IC9.A3 22.2,28.09 22.2,28.05 | 19.92,27.97 20.04,27.97 C23.1 | 19.92,27.97 19.53,27.97 19.15,27.59 IC1.B2 | 21.05,27.85 20.55,28.35 20.3,28.35 19.92,27.97 | 21.06,27.84 21.05,27.85
  Bottom 0.127: v15.75,23.05 v11.25,18.55